# Altium PCB D1.PcbDoc
Units mil, origin at the board's own origin, x right, y up, seen from the top; angles counter-clockwise.
Board outline 5050 x 2000 mil, 2 copper layers (Top Layer, Bottom Layer); 24 components, 36 nets, 135 pads, 5 vias.
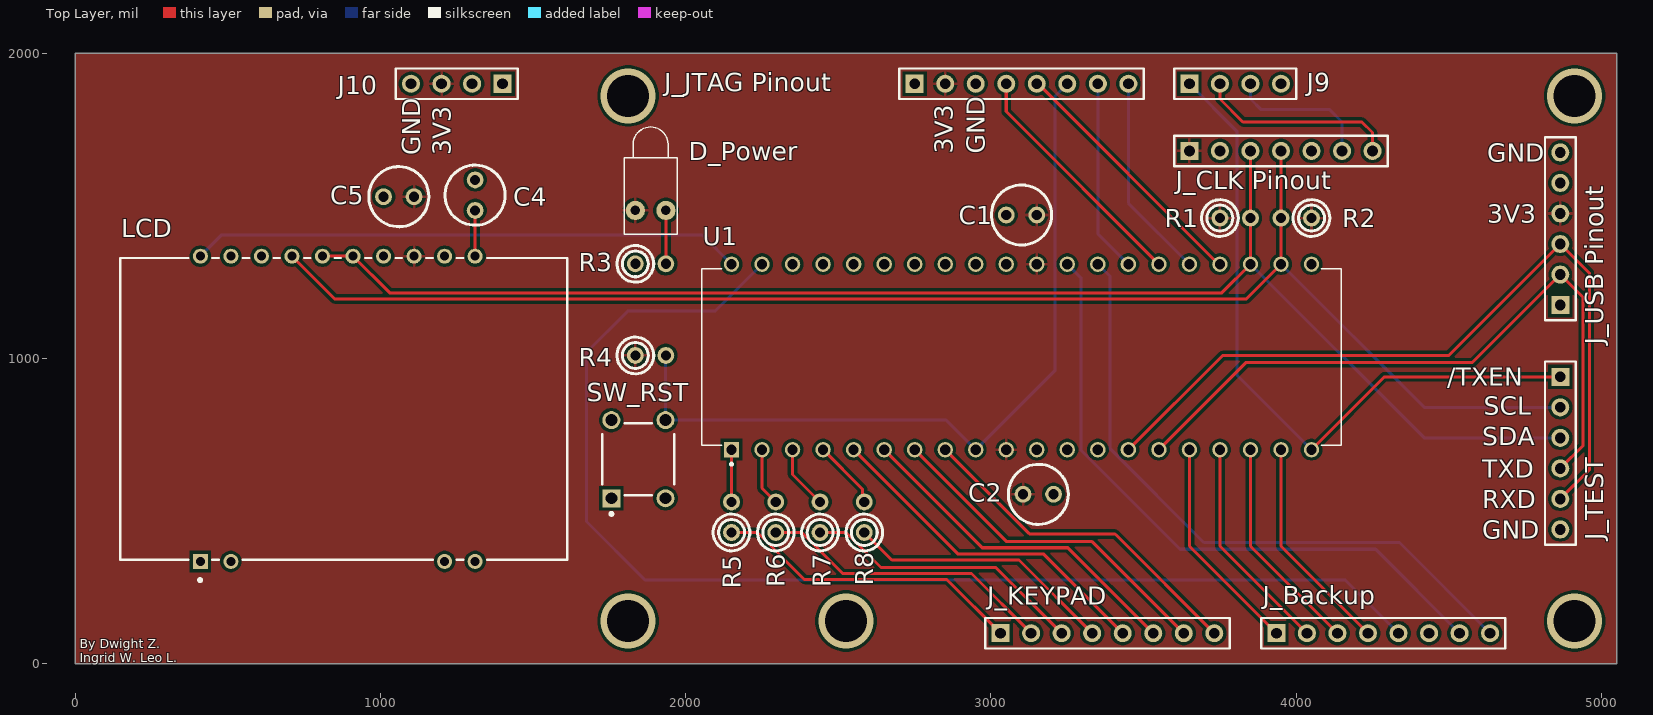
[diagram p0: Top Layer view]
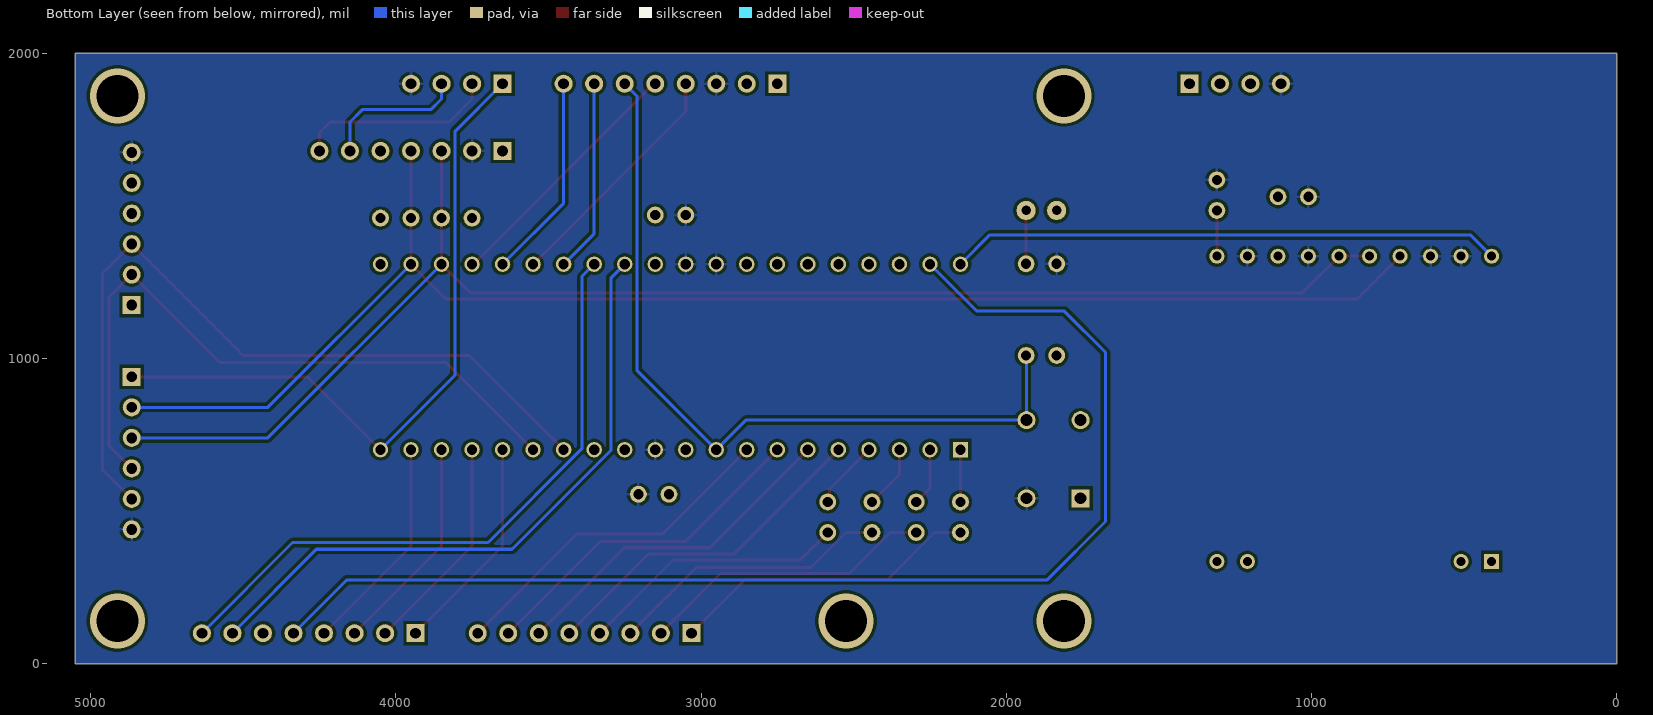
[diagram p1: Bottom Layer view, seen from below]

## Layer stack, top to bottom
Top Solder: solder mask 0.4, Solder Resist, Dk 3.5
Top Layer: signal copper 1.4
Dielectric 1: dielectric 12.6, FR-4, Dk 4.8
Bottom Layer: signal copper 1.4
Bottom Solder: solder mask 0.4, Solder Resist, Dk 3.5

## Board outline
0,2000 5050,2000 5050,0 0,0

## Design rules (kind name [scope] priority, off if disabled: settings)
Clearance [All] p1: gap=10 ignorepadtopadclearanceinfootprint=FALSE except(0: Arc-Hole Track-Hole SMDPad-Hole THPad-Hole Via-Hole Fill-Hole Poly-Hole Region-Hole Text-Hole)
HoleSize [All] p1: absolutevalues=TRUE maxlimit=900 minlimit=12 maxpercent=80.000 minpercent=20.000
MinimumSolderMaskSliver [All] p1: minsoldermaskwidth=1
PolygonConnect [All] p1: connectstyle=Relief reliefconductorwidth=10 reliefentries=4 polygonreliefangle="90 Angle" airgapwidth=10
RoutingVias [All] p1: holewidth=12 width=24 viastyle="Through Hole" minholewidth=12 minwidth=24 maxholewidth=100 maxwidth=200
SilkToSilkClearance [All] p1: silktosilkclearance=0
SilkToSolderMaskClearance [IsPad] p1: minsilkscreentomaskgap=1 clearancetoexposedcopper=TRUE
SolderMaskExpansion [All] p1: expansion=4 istentingtop=FALSE
Width [All] p1: maxlimit=200 minlimit=10 preferedwidth=10
26 further rules are at their usual default settings.

## Components (designator, comment, footprint, x,y, rotation, side; value= is the part's Value field where it differs from the comment)
C1 "Cap" RADIAL-0.1 3100,1470 r180 top value=1UF
C2 "Cap" RADIAL-0.1 3155,555 r0 top value=1UF
C4 "Cap" RADIAL-0.1 1310,1535 r90 top value=1UF
C5 "Cap" RADIAL-0.1 1060,1530 r0 top value=1UF
D_Power "LED1" LED-1 1885,1485 r90 top
J9 "Header 4" HDR1X4 3650,1900 r0 top
J10 "Header 4" HDR1X4 1400,1900 r180 top
J_Backup "Header 8" HDR1X8 3935,100 r0 top
"J_CLK Pinout" "Header 7" HDR1X7 3650,1680 r0 top
"J_JTAG Pinout" "Header 8" HDR1X8 2750,1900 r0 top
J_KEYPAD "Header 8" HDR1X8 3031.5,100 r0 top
J_TEST "Header 6" HDR1X6 4865,940 r270 top
"J_USB Pinout" "Header 6" HDR1X6 4865,1175 r90 top
LCD "EA DOGS104N-A" FP-EA_DOGS104N-A-MFG 879.68,835 r0 top
R1 "Res1" AXIAL-0.1-RES 3800,1460 r0 top value=10K
R2 "Res1" AXIAL-0.1-RES 4000,1460 r180 top value=10K
R3 "Res1" AXIAL-0.1-RES 1885,1310 r0 top value=120
R4 "Res1" AXIAL-0.1-RES 1885,1010 r0 top value=10K
R5 "Res1" AXIAL-0.1-RES 2150,480 r90 top value=1K
R6 "Res1" AXIAL-0.1-RES 2295,480 r90 top value=1K
R7 "Res1" AXIAL-0.1-RES 2440,480 r90 top value=1K
R8 "Res1" AXIAL-0.1-RES 2585,480 r90 top value=1K
SW_RST "1825910-6" TECO-1825910-6_V 1845,670 r90 top
U1 "ATMEGA324A-PU" "40-DIP (0.600\", 15.24mm)" 3100,1005 r90 top

## Footprints (in the part's own frame and the unit in brackets; to place one, negate y for a bottom-side part, rotate by r counter-clockwise, add the part's x,y. Pads: shape width x height; smd on the part's side, far side on the other; paste and mask are expansions set on the pad)
"40-DIP (0.600\", 15.24mm)" [mm]
  rect 1.28x1.28 hole 0.85: 1(-7.718,24.13)
  round 1.28 hole 0.85: 2(-7.718,21.59) 3(-7.718,19.05) 4(-7.718,16.51) 5(-7.718,13.97) 6(-7.718,11.43) 7(-7.718,8.89) 8(-7.718,6.35) 9(-7.718,3.81) 10(-7.718,1.27) 11(-7.718,-1.27) 12(-7.718,-3.81) 13(-7.718,-6.35) 14(-7.718,-8.89) 15(-7.718,-11.43) 16(-7.718,-13.97) 17(-7.718,-16.51) 18(-7.718,-19.05) 19(-7.718,-21.59) 20(-7.718,-24.13) 21(7.718,-24.13) 22(7.718,-21.59) 23(7.718,-19.05) 24(7.718,-16.51) 25(7.718,-13.97) 26(7.718,-11.43) 27(7.718,-8.89) 28(7.718,-6.35) 29(7.718,-3.81) 30(7.718,-1.27) 31(7.718,1.27) 32(7.718,3.81) 33(7.718,6.35) 34(7.718,8.89) 35(7.718,11.43) 36(7.718,13.97) 37(7.718,16.51) 38(7.718,19.05) 39(7.718,21.59) 40(7.718,24.13)
  silkscreen extent -9.02,-26.6 7.35,26.6
AXIAL-0.1-RES [mm] "Axial Device, Thru-Hole; 2 Leads; 0.3 in Pin Spacing"
  round 1.4 hole 0.85: 1(-1.27,0) 2(1.27,0)
  silkscreen extent -2.8,-1.53 0.26,1.53
FP-EA_DOGS104N-A-MFG [mm]
  rect 1.25x1.25 hole 0.75 paste-1000 mask+0: 1(-11.93,-12.7)
  round 1.25 hole 0.75 paste-1000 mask+0: 2(-9.39,-12.7) 9(8.39,-12.7) 10(10.93,-12.7) 11(10.93,12.7) 12(8.39,12.7) 13(5.85,12.7) 14(3.31,12.7) 15(0.77,12.7) 16(-1.77,12.7) 17(-4.31,12.7) 18(-6.85,12.7) 19(-9.39,12.7) 20(-11.93,12.7)
  silkscreen extent -18.6,-14.37 18.6,12.55, body extent -18.7,-13.42 18.7,13.42, height 0.25
HDR1X4 [mm] "Connector; Header; 4 Position"
  rect 1.5x1.5 hole 0.9: 1(0,0)
  round 1.5 hole 0.9: 2(2.54,0) 3(5.08,0) 4(7.62,0)
  silkscreen extent -1.27,-1.27 8.89,1.27
HDR1X6 [mm] "Connector; Header; 6 Position"
  rect 1.5x1.5 hole 0.9: 1(0,0)
  round 1.5 hole 0.9: 2(2.54,0) 3(5.08,0) 4(7.62,0) 5(10.16,0) 6(12.7,0)
  silkscreen extent -1.27,-1.27 13.97,1.27
HDR1X7 [mm] "Connector; Header; 7 Position"
  rect 1.5x1.5 hole 0.9: 1(0,0)
  round 1.5 hole 0.9: 2(2.54,0) 3(5.08,0) 4(7.62,0) 5(10.16,0) 6(12.7,0) 7(15.24,0)
  silkscreen extent -1.27,-1.27 16.51,1.27
HDR1X8 [mm] "Connector; Header; 8 Position"
  rect 1.5x1.5 hole 0.9: 1(0,0)
  round 1.5 hole 0.9: 2(2.54,0) 3(5.08,0) 4(7.62,0) 5(10.16,0) 6(12.7,0) 7(15.24,0) 8(17.78,0)
  silkscreen extent -1.27,-1.27 19.05,1.27
LED-1 [mm] "LED; 2 Leads"
  round 1.6 hole 0.8: 1(0,1.27) 2(0,-1.27)
  silkscreen extent -2,-2.2 6.95,2.2
RADIAL-0.1 [mm] "Axial Device, Thru-Hole; 2 Leads; 0.3 in Pin Spacing"
  round 1.4 hole 0.85: 1(-1.27,0) 2(1.27,0)
  silkscreen extent -2.5,-2.5 2.5,2.5
TECO-1825910-6_V [mm] "Switch, 4-Leads, Body 5.99x5.99mm"
  rect 1.5x1.5 hole 0.99: 1(-3.25,2.25)
  round 1.5 hole 0.99: 2(3.25,2.25) 3(-3.25,-2.25) 4(3.25,-2.25)
  silkscreen extent -4.67,-2.99 2.99,3, body extent -3,-2.99 2.99,3, height 5

## Part data
C1 C2 C4 C5: library part "CAP CER 1UF 50V X7R RADIAL", "Capacitor", Manufacturer Part Number=C333C105K5R5TA7301, Voltage Rating=50V, LatestRevisionDate=17-Jul-2002, LatestRevisionNote="Re-released for DXP Platform.", Published=8-Jun-2000, Publisher="Altium Limited"
D_Power: "Typical RED GaAs LED", LatestRevisionDate=08-Jul-2005, LatestRevisionNote="Mech Layer 1 removed.", PackageDescription="LED; 2 Leads", PackageReference=LED-1, Published=8-Jun-2000, Publisher="Altium Limited"
J9 J10: "Conn Header Vert 4POS 2.54MM", Color=Black, Manufacturer=Sullins, Manufacturer Part Number=PRPC004SAAN-RC, Package Quantity=1, Supplier Part Number 1=S1011EC-04-ND, Category=Connectors, ComponentLink1Description=https://datasheet.ciiva.com/741/xrxczzzsxxn-rc-st-11635-b-741241.pdf?src-supplier=Digi-Key, ComponentLink1URL=https://datasheet.ciiva.com/741/xrxczzzsxxn-rc-st-11635-b-741241.pdf?src-supplier=Digi-Key, Connector Type="Male Pin", Contact Mating Length=0.23inch, Contact Plating=Gold, Contact Type="Male Pin", LatestRevisionDate=17-Jul-2002, LatestRevisionNote="Re-released for DXP Platform.", Mount="Through Hole", Number of Positions=4, Number of Rows=1, Packaging=Bulk, Pitch=0.1inch, Pricing 1="1=0.15000, 10=0.14600, 25=0.10840, 50=0.09280, 100=0.08980, 250=0.07740, 500=0.07430 (USD)", Publisher="Altium Limited", RoHS=Yes, RoHS Compliant=Yes, Series=-, Stock 1=11663, Supplier 1=Digi-Key, Termination=Solder
J_Backup "J_JTAG Pinout" J_KEYPAD: "Conn Header Vert 8POS 2.54MM", Color=Black, Manufacturer=Sullins, Manufacturer Part Number=PRPC008SAAN-RC, Package Quantity=1, Supplier Part Number 1=S1011EC-08-ND, Category=Connectors, ComponentLink1Description=https://datasheet.ciiva.com/741/xrxczzzsxxn-rc-st-11635-b-741237.pdf?src-supplier=Digi-Key, ComponentLink1URL=https://datasheet.ciiva.com/741/xrxczzzsxxn-rc-st-11635-b-741237.pdf?src-supplier=Digi-Key, Connector Type="Male Pin", Contact Mating Length=0.23inch, Contact Plating=Gold, Contact Type="Male Pin", LatestRevisionDate=17-Jul-2002, LatestRevisionNote="Re-released for DXP Platform.", Lead Free="Lead Free", Mount="Through Hole", Number of Positions=8, Number of Rows=1, Packaging=Bulk, Pitch=0.1inch, Pricing 1="1=0.25000, 10=0.23200, 25=0.19800, 50=0.17340, 100=0.16100, 250=0.14240, 500=0.13622 (USD)", Publisher="Altium Limited", RoHS=Yes, RoHS Compliant=Yes, Series=-, Supplier 1=Digi-Key, Termination=Solder
  J_Backup: Stock 1=4475
  "J_JTAG Pinout": Stock 1=5110
  J_KEYPAD: Stock 1=4930
"J_CLK Pinout": "Female, 7C, Straight, .100\"CC; 3.20mm Tail, No Mt. 100u\" Tin; PBT, Phos Bronze, 105 C", Color=Black, Manufacturer=Sullins, Manufacturer Part Number=PPTC071LFBN-RC, Package Quantity=1000, Supplier Part Number 1=S7005-ND, Category=Connectors, ComponentLink1Description=https://media.digikey.com/pdf/Data%20Sheets/Sullins%20PDFs/Female_Headers.100_DS.pdf?src-supplier=Digi-Key, ComponentLink1URL=https://media.digikey.com/pdf/Data%20Sheets/Sullins%20PDFs/Female_Headers.100_DS.pdf?src-supplier=Digi-Key, ComponentLink2Description=http://www.sullinscorp.com/catalogs/78_Page80-81_HEADER_.100_2.54mm_FEMALE.pdf?src-supplier=Future+Electronics, ComponentLink2URL=http://www.sullinscorp.com/catalogs/78_Page80-81_HEADER_.100_2.54mm_FEMALE.pdf?src-supplier=Future+Electronics, Connector Type=Header, Contact Material=Bronze, Contact Plating=Tin, Contact Type="Female Socket", Height=8.5mm, Housing Material=Plastic, LatestRevisionDate=17-Jul-2002, LatestRevisionNote="Re-released for DXP Platform.", Lead Free="Lead Free", Length=18.3mm, Mount="Through Hole", Number of Positions=7, Number of Rows=1, Packaging=Bulk, Pitch=0.1inch, Pricing 1="1=0.59000, 10=0.51500, 80=0.42438, 440=0.36900, 1000=0.30442, 5000=0.26752, 10000=0.26650 (USD)", Publisher="Altium Limited", RoHS=Yes, Stock 1=31167, Supplier 1=Digi-Key, Termination=Solder, Width=2.5mm
J_TEST "J_USB Pinout": "Conn Header .100\" Sngl Str 6POS", Color=Black, Manufacturer=Sullins, Manufacturer Part Number=PRPC006SAAN-RC, Package Quantity=1, Supplier Part Number 1=S1011EC-06-ND, Category=Connectors, ComponentLink1Description=https://datasheet.ciiva.com/741/xrxczzzsxxn-rc-st-11635-b-741239.pdf?src-supplier=Digi-Key, ComponentLink1URL=https://datasheet.ciiva.com/741/xrxczzzsxxn-rc-st-11635-b-741239.pdf?src-supplier=Digi-Key, Connector Type="Male Pin", Contact Mating Length=0.23inch, Contact Plating=Gold, Contact Type="Male Pin", LatestRevisionDate=17-Jul-2002, LatestRevisionNote="Re-released for DXP Platform.", Lead Free="Lead Free", Mount="Through Hole", Number of Positions=6, Number of Rows=1, Packaging=Bulk, Pitch=0.1inch, Pricing 1="1=0.19000, 10=0.17400, 25=0.14880, 50=0.13000, 100=0.12070, 250=0.10680, 500=0.10216 (USD)", Publisher="Altium Limited", RoHS=Yes, RoHS Compliant=Yes, Series=-, Supplier 1=Digi-Key, Termination=Solder
  J_TEST: Stock 1=12344
  "J_USB Pinout": Stock 1=14553
LCD: library part CMP-140401-000002-2, "LCD MOD 40DIG 10X4 TRANSFLECTIVE", Colour=White, Manufacturer="Display Visions", Package=0, Temperature="-20°C to +70°C", Temperature Range High=+70°C, Temperature Range Low=-20°C, Automotive=No, Category=Disp, ComponentLink2Description=Datasheet, ComponentLink2URL=https://www.lcd-module.de/fileadmin/html-seiten/eng/pdf/doma/dogs104e.pdf, Device Class L1=Optoelectronics, Device Class L2=Displays, Device Class L3=LCD, Digikey Description="LCD MOD 40DIG 10X4 TRANSFLECTIVE", Display Type=LCD, Height=4.6mm, Interface=I2C,SPI, Lead Free=Yes, Manufacturer Part Number="EA DOGS104N-A", Number Of Characters=40, Octopart=https://octopart.com/ea+dogs104n-a-display+visions-99339937, RoHS=TRUE, Standoff Height=1.5mm, Viewing Angle=180°
R1 R2 R4: library part "RES 10K OHM 5% 1/4W AXIAL", "Resistor", Manufacturer Part Number=CFR-25JB-52-10K, Power Rating=1/4W, Tolerance=0.05, LatestRevisionDate=17-Jul-2002, LatestRevisionNote="Re-released for DXP Platform.", Published=8-Jun-2000, Publisher="Altium Limited"
R3: library part "RES 120 OHM 5% 1/4W AXIAL", "Resistor", Manufacturer Part Number=CFR-25JB-52-120R, Power Rating=1/4W, Tolerance=0.05, LatestRevisionDate=17-Jul-2002, LatestRevisionNote="Re-released for DXP Platform.", Published=8-Jun-2000, Publisher="Altium Limited"
R5 R6 R7 R8: library part "RES 1K OHM 5% 1/4W AXIAL", "Resistor", Manufacturer Part Number=CFR-25JB-52-1K, Power Rating=1/4W, Tolerance=0.05, LatestRevisionDate=17-Jul-2002, LatestRevisionNote="Re-released for DXP Platform.", Published=8-Jun-2000, Publisher="Altium Limited"
SW_RST: library part CMP-1684-00021-1, "Tact Switch, SPST-NO, 0.05 A, -35 to 85 degC, 4-Pin THD, RoHS, Bulk", Actuator Color=Black, Contact Rating @ Voltage=0.05A@24VDC, Dielectric Strength=500VAC, Manufacturer="TE Connectivity", Maximum AC Voltage Rating=N/A, Maximum Contact Resistance=100mOhm, Maximum DC Voltage Rating=24V, Minimum Insulation Resistance=100MOhm, Operating Temperature=-35to85C, Package Description="4-Pin Through Hole Device, Body 5.99 x 5.99 mm, Pitch 6.5 mm", Package Reference=THD, Actuator Length=1.4mm, Actuator Material=PolybutyleneTerephthalate, Actuator Style=RoundButton, Base Material=N/A, Body Orientation=Straight, Bushing Type=Unthreaded, Contact Material=CopperAlloy, Contact Plating=Silver, Datasheet URL=http://www.te.com/commerce/DocumentDelivery/DDEController?Action=showdoc&DocId=Customer+Drawing%7F1825910%7FC9%7Fpdf%7FEnglish%7FENG_CD_1825910_C9.pdf%7F1825910-6, Datasheet Version="Rev. C9", Dimension=5.99x5mm, Electrical Life=100000Cycles, Family=1825910, Function=MomentaryContact, Housing Material=N/A, Illumination=N/R, Manufacturer URL=http://www.te.com, Mechanical Life=100000Cycles, Mounting=ThroughHole, Packaging=N/A, Part No=1825910-6, Pole Throw Configuration=SPST, Product Weight=N/A, RoHS=Yes, Seal Description=N/A, Seal Location=N/A, Switch Configuration=OFF(ON), Terminal Type=PCPins, Thread Size=N/R
U1: "AVR series Microcontroller IC 8-Bit 20MHz 32KB (16K x 16) FLASH 40-PDIP", Package="PDIP-40 Microchip", Availability="In Stock", Check_prices=https://www.snapeda.com/parts/ATMEGA324A-PU/Microchip/view-part/?ref=eda, Manufacturer Part Number=ATMEGA324A-PU, MF="Microchip Technology", MP=ATMEGA324A-PU, Price=None, Purchase-URL=https://pricing.snapeda.com/search/part/ATMEGA324A-PU/?ref=eda, SnapEDA_Link=https://www.snapeda.com/parts/ATMEGA324A-PU/Microchip/view-part/?ref=snap

## Via types
v1: diameter 180, hole 138, Top Layer to Bottom Layer, 5 vias

## Nets (pads, with @x,y where several pads share a name; then routed paths per layer and width w, separated by ;. In a path a pad name is that pad's centre, name@x,y a point inside that pad or via, vN(x,y) a via of type N, cw(c..) or ccw(c..) an arc to the next point about the centre after c; other vN are vias at no path point)
+3.3V: "J_CLK Pinout.1" "J_JTAG Pinout.2" "J_USB Pinout.4" C1.1 C2.1 C5.2 D_Power.1 J10.3 LCD.13 R1.1 R2.1 R4.1 U1.10 U1.30
/TXEN: J9.1 J_TEST.1 U1.20 | length 2278.5
  Top Layer w10: U1.20 4288.84,940 J_TEST.1
  Bottom Layer w10: J9.1 3805.47,1744.53 3805.47,945.69 U1.20
BK1: J_Backup.1 U1.16 | length 719.2
  Top Layer w10: U1.16 3650,385 J_Backup.1
BK2: J_Backup.2 U1.17 | length 719.2
  Top Layer w10: U1.17 3750,385 J_Backup.2
BK3: J_Backup.3 U1.18 | length 719.2
  Top Layer w10: U1.18 3850,385 J_Backup.3
BK4: J_Backup.4 U1.19 | length 719.2
  Top Layer w10: U1.19 3950,385 J_Backup.4
BK5: J_Backup.5 U1.39 | length 4060.3
  Bottom Layer w10: U1.39 2096.16,1155 1810,1155 1675,1020 1675,465.86 1865.86,275 4160,275 J_Backup.5
BK7: J_Backup.7 U1.29 | length 2116.4
  Bottom Layer w10: U1.29 3295.54,1263.3 3295.54,698.77 3619.31,375 4260,375 J_Backup.7
BK8: J_Backup.8 U1.28 | length 2116.4
  Bottom Layer w10: U1.28 3390.2,1268.64 3390.2,704.12 3697.37,396.95 4338.05,396.95 J_Backup.8
DISPRST: LCD.20 U1.40 | length 1808.8
  Bottom Layer w10: LCD.20 480,1405 2053.84,1405 U1.40
GND: "J_CLK Pinout.2" "J_JTAG Pinout.3" "J_USB Pinout.6" C1.2 C2.2 C4.2 C5.1 J9.4 J10.4 J_TEST.6 LCD.12 LCD.14 LCD.18 LCD.19 R3.1 SW_RST.3 U1.11 U1.31 U1.32
KPD1: R5.2 U1.1 | length 171.2
  Top Layer w10: R5.2 U1.1
KPD2: R6.2 U1.2 | length 189.8
  Top Layer w10: U1.2 2250,575 R6.2
KPD3: R7.2 U1.3 | length 208.4
  Top Layer w10: U1.3 2350,620 R7.2
KPD4: R8.2 U1.4 | length 227.1
  Top Layer w10: U1.4 2578.6,572.56 2578.6,536.4 R8.2
KPD5: J_KEYPAD.5 U1.5 | length 1130.5
  Top Layer w10: U1.5 2891.16,360 3171.5,360 J_KEYPAD.5
KPD6: J_KEYPAD.6 U1.6 | length 1130.5
  Top Layer w10: U1.6 2971.16,380 3251.5,380 J_KEYPAD.6
KPD7: J_KEYPAD.7 U1.7 | length 1130.5
  Top Layer w10: U1.7 3051.16,400 3331.5,400 J_KEYPAD.7
KPD8: J_KEYPAD.8 U1.8 | length 1130.5
  Top Layer w10: U1.8 3123.23,427.93 3126.16,425 3406.5,425 3409.43,422.07 J_KEYPAD.8
KPDC1: J_KEYPAD.1 R5.1 | length 1018.2
  Top Layer w10: R5.1 2234.81,430 2389.37,275.45 2856.05,275.45 J_KEYPAD.1
KPDC2: J_KEYPAD.2 R6.1 | length 973.2
  Top Layer w10: R6.1 2379.81,430 2514.37,295.45 2936.05,295.45 J_KEYPAD.2
KPDC3: J_KEYPAD.3 R7.1 | length 928.2
  Top Layer w10: R7.1 2524.81,430 2639.37,315.45 3016.05,315.45 J_KEYPAD.3
KPDC4: J_KEYPAD.4 R8.1 | length 883.2
  Top Layer w10: R8.1 2675,340 3091.5,340 J_KEYPAD.4
LO_F1_0: "J_CLK Pinout.7" J9.2 | length 655.6
  Top Layer w10: J9.2 3750,1850 3825,1775 4215,1775 4250,1740 4250,1680
LO_F1_90: "J_CLK Pinout.6" J9.3 | length 476.1
  Bottom Layer w10: J9.3 3850,1850 3885,1815 4110,1815 4150,1775 4150,1680
NetC4_1: C4.1 LCD.11 | length 150
  Top Layer w10: LCD.11 C4.1
NetD_Power_2: D_Power.2 R3.2 | length 178.5
  Top Layer w10: R3.2@1932.5,1312.5 R3.2 D_Power.2
RST: "J_JTAG Pinout.6" R4.2 SW_RST.4 U1.9 | length 2592.3
  Bottom Layer w10: R4.2 1934.29,1009.29 1934.29,798.66 SW_RST.4 2853.21,797.95 U1.9 3210,961.16 3210,1304.86 cw(c3250,1308.84) 3210,1312.81 3210,1860 3250,1900
RXD: "J_USB Pinout.3" J_TEST.5 U1.14 | length 2607.8
  Top Layer w10: U1.14 3758.84,1010 4500,1010 4865,1375 4960,1280 4960,635 J_TEST.5
SCL: "J_CLK Pinout.4" J_TEST.2 LCD.17 R2.2 U1.22 | length 4825.5
  Top Layer w10: LCD.17 850,1195 3836.16,1195 U1.22 R2.2 3950,1680
  Bottom Layer w10: U1.22 4418.84,840 J_TEST.2
SDA: "J_CLK Pinout.3" J_TEST.3 LCD.15 LCD.16 R1.2 U1.23 | length 4750.4
  Top Layer w10: LCD.16 LCD.15 1030,1215 3756.16,1215 U1.23 R1.2 3850,1680
  Bottom Layer w10: U1.23 4418.84,740 J_TEST.3
TCK: "J_JTAG Pinout.5" U1.24 | length 844.9
  Top Layer w10: 3150,1900 3154.42,1900 3745.58,1308.84 U1.24
TDI: "J_JTAG Pinout.7" U1.27 | length 639.7
  Top Layer w10: U1.27@3445,1313.84 U1.27
  Bottom Layer w10: 3350,1900 3350,1408.84 U1.27
TDO: "J_JTAG Pinout.4" U1.26 | length 798.3
  Top Layer w10: 3050,1900 3050,1808.84 U1.26
TMS: "J_JTAG Pinout.8" U1.25 | length 674
  Bottom Layer w10: 3450,1900 3450,1508.84 U1.25
TXD: "J_USB Pinout.2" J_TEST.4 U1.15 | length 2249.8
  Top Layer w10: U1.15 3836.09,987.25 4577.25,987.25 4865,1275 4940,1200 4940,715 J_TEST.4
pads on no net: "J_CLK Pinout.5" "J_JTAG Pinout.1" "J_USB Pinout.1" "J_USB Pinout.5" J10.1 J10.2 J_Backup.6 LCD.1 LCD.2 LCD.9 LCD.10 SW_RST.1 SW_RST.2 U1.12 U1.13 U1.21 U1.33 U1.34 U1.35 U1.36 U1.37 U1.38
copper on no net:
  other v1: 1811.02,140 2525,140 4912,140 1811.02,1860 4912,1860

## Polygon pours and split planes (outlines as drawn)
+3.3V on Top Layer "+3.3V_Pour" (solid, pour order 0): 0,2000 5050,2000 5050,0 0,0
GND on Bottom Layer "GND_Pour" (solid, pour order 1): 0,2000 5050,2000 5050,0 0,0

## Silkscreen, mask and mechanical layers (free items; w line width, h text height)
Top Overlay:
  text "3V3" at 2875,1670 h60 r90
  text "GND" at 2980,1670 h60 r90
  text "GND" at 1130,1665 h60 r90
  text "3V3" at 1230,1665 h60 r90
  text "GND" at 4625,1645 h60
  text "3V3" at 4625,1445 h60
  text "/TXEN" at 4495,910 h60
  text "SCL" at 4615,815 h60
  text "SDA" at 4610,715 h60
  text "TXD" at 4610,610 h60
  text "RXD" at 4610,510 h60
  text "GND" at 4610,410 h60
  text "By Dwight Z. / Ingrid W. Leo L." at 15,5 h30
Mechanical 1:
  the board outline again, w47.24